# Altium PCB CAN_CANS6.PcbDoc
Units mm, origin at the board's own origin, x right, y up, seen from the top; angles counter-clockwise.
Board outline 61 x 43 mm, 2 copper layers (Top Layer, Bottom Layer); 72 components, 51 nets, 290 pads, 196 vias.
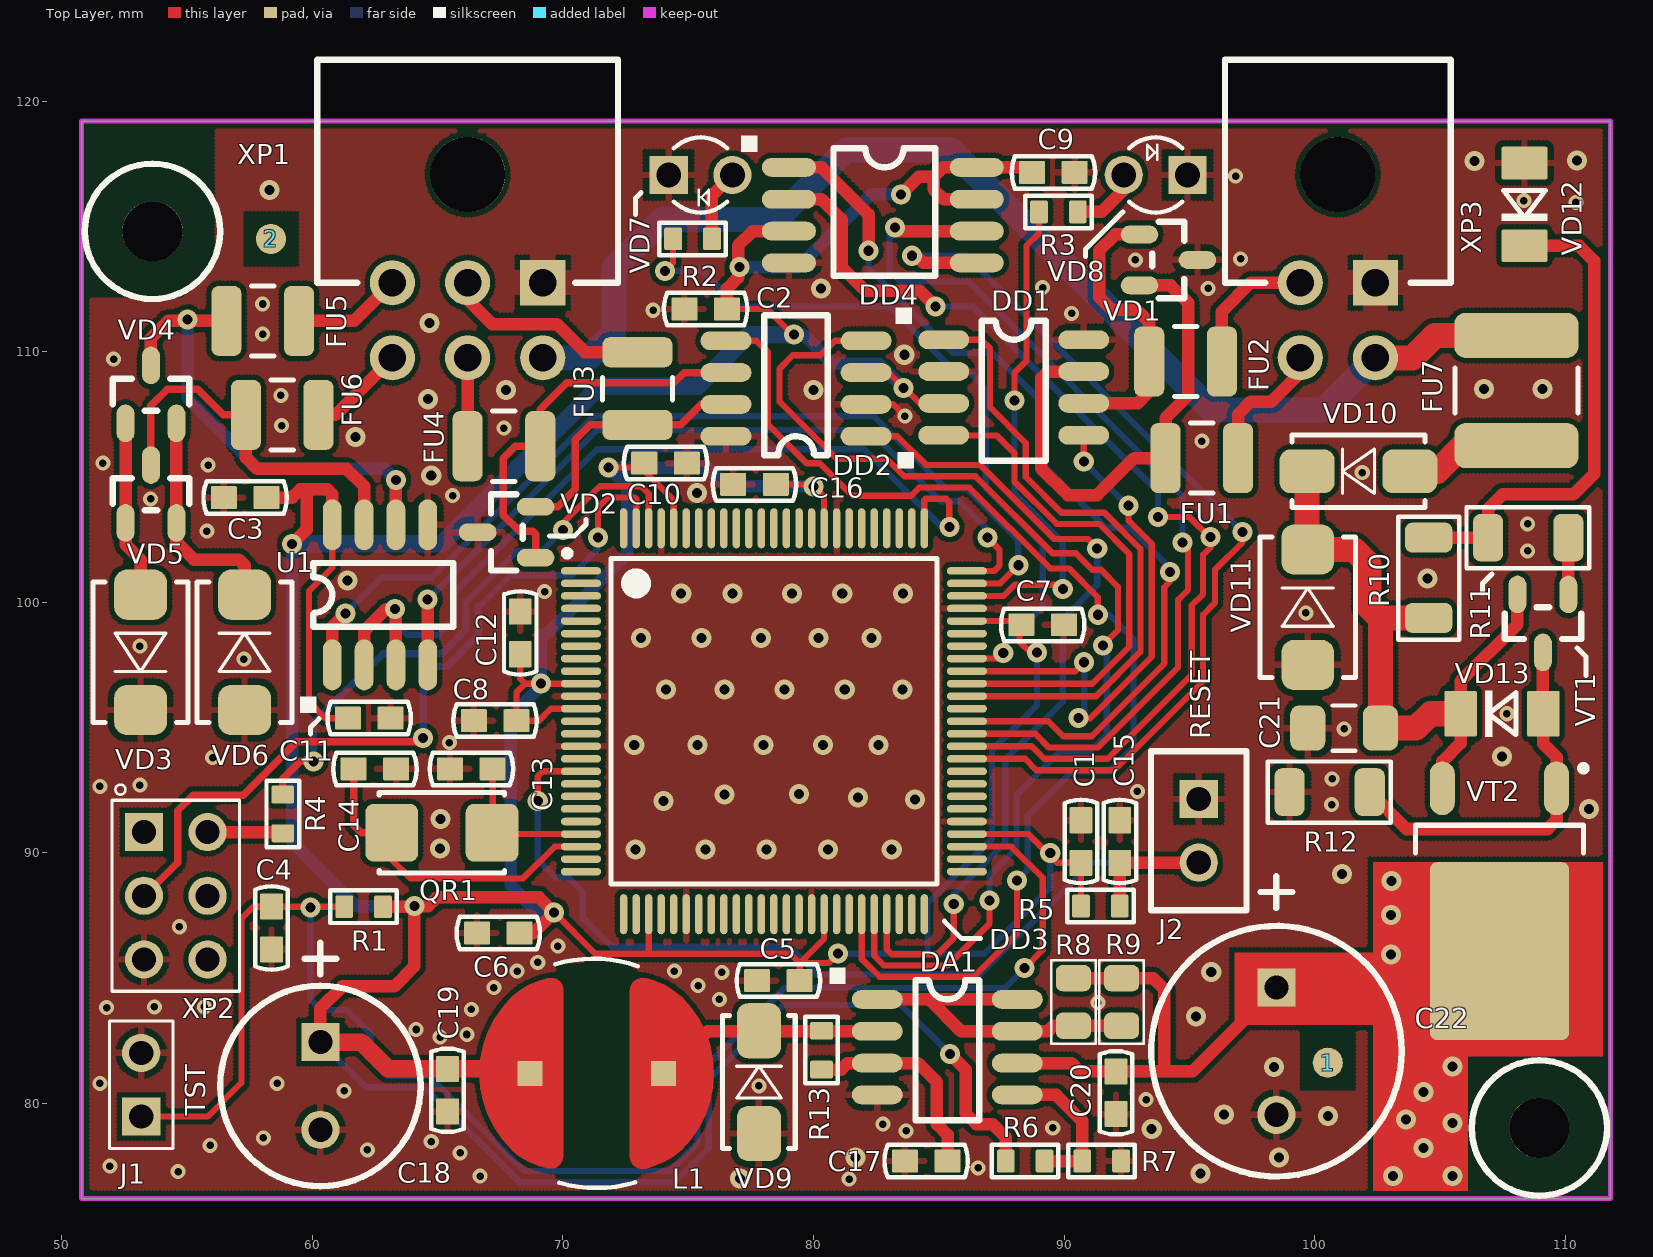
[diagram p0: Top Layer view]
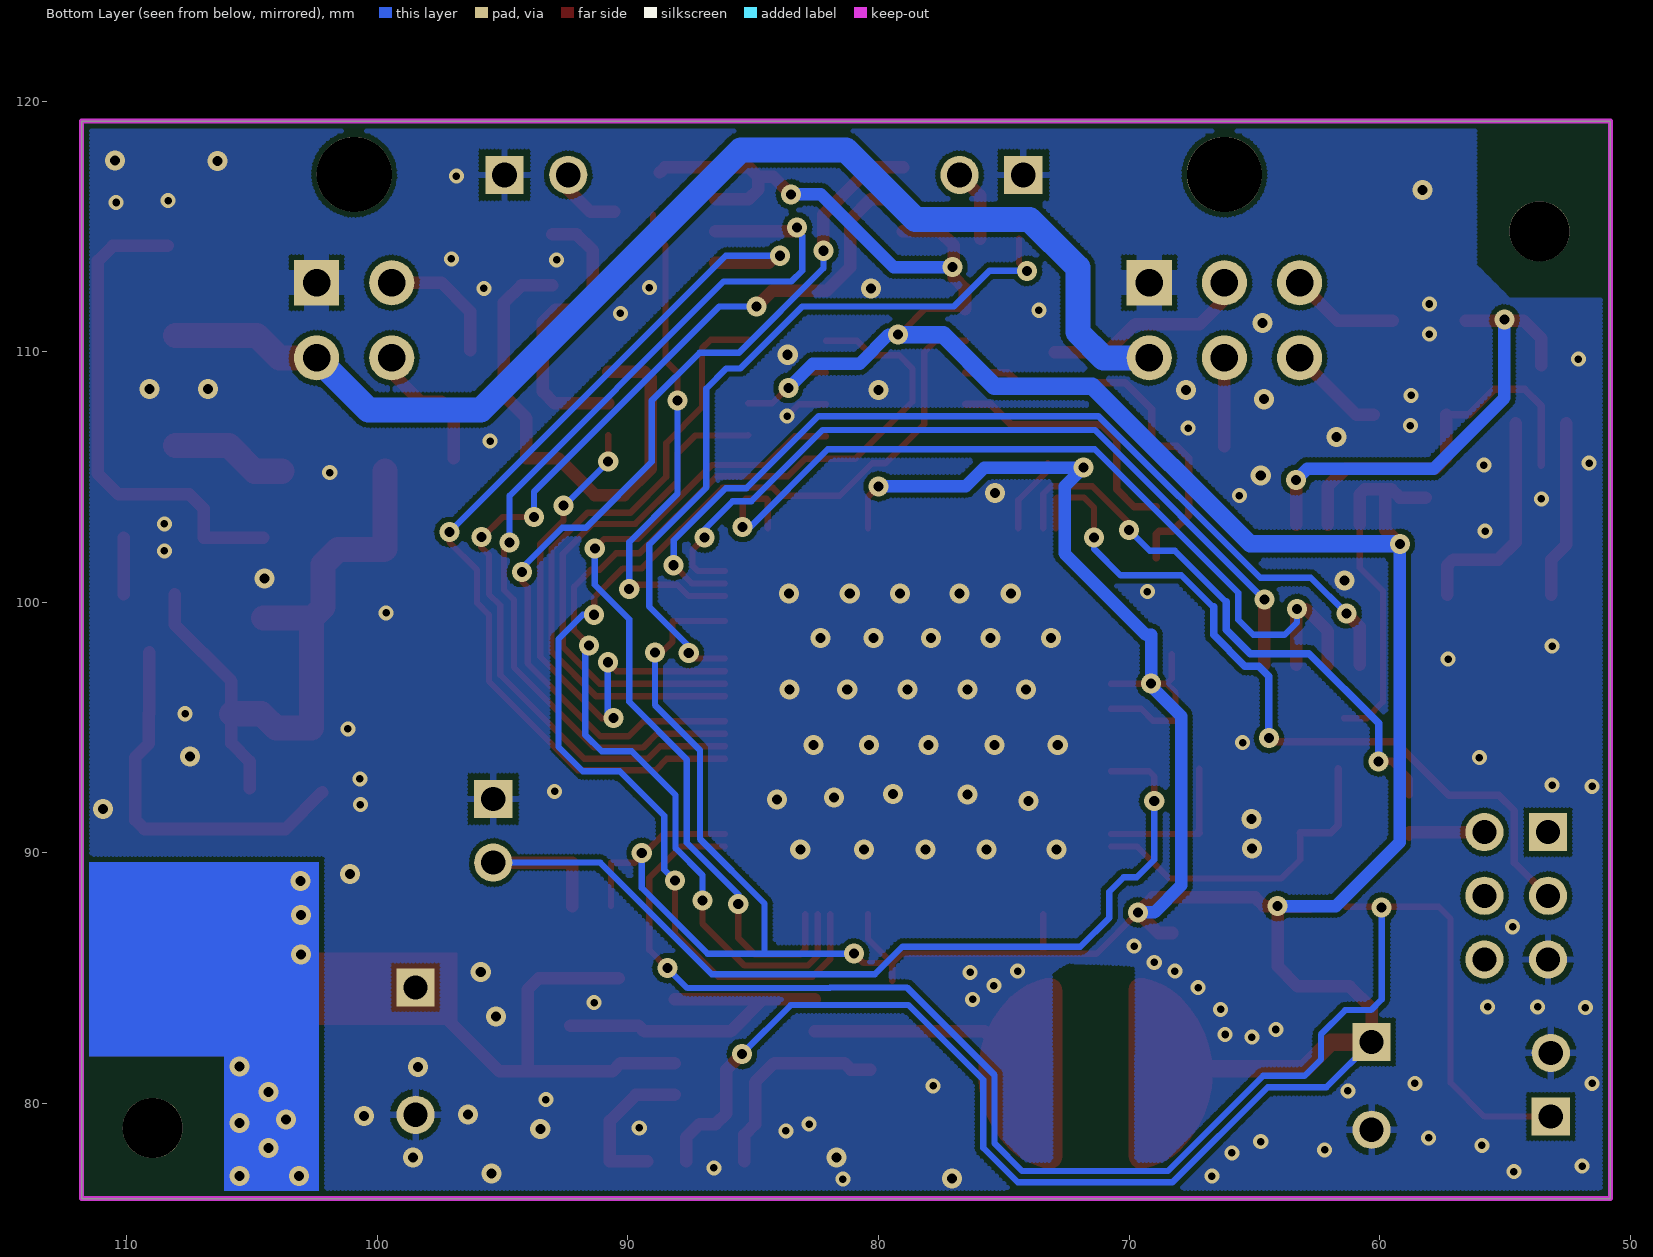
[diagram p1: Bottom Layer view, seen from below]

## Layer stack, top to bottom
Top Solder: solder mask 0.0102, Solder Resist, Dk 3.5
Top Layer: signal copper 0.0356
Dielectric 1: dielectric 0.32, FR-4, Dk 4.8
Bottom Layer: signal copper 0.0356
Bottom Solder: solder mask 0.0102, Solder Resist, Dk 3.5

## Board outline
50.8,76.2 111.8,76.2 111.8,119.2 50.8,119.2

## Design rules (kind name [scope] priority, off if disabled: settings)
Clearance [All] p1: gap=0.2
ComponentClearance [All] p1: gap=0 collisioncheckmode=3 verticalgap=2540 showdistances=TRUE
HoleSize [All] p1: absolutevalues=TRUE maxlimit=5 minlimit=0.025 maxpercent=80.000 minpercent=20.000
PolygonConnect PolygonConnect_2 [(InNet('GND') AND InComponent('XP1')) OR (InNet('GND') AND InComponent('XP3'))] p1: connectstyle=Relief reliefconductorwidth=1 reliefentries=4 polygonreliefangle="90 Angle" airgapwidth=0.2
PolygonConnect PolygonConnect_1 [IsVia] p2: connectstyle=Direct reliefconductorwidth=0.254 reliefentries=4 polygonreliefangle="90 Angle" airgapwidth=0.254
PolygonConnect [All] p3: connectstyle=Relief reliefconductorwidth=0.254 reliefentries=4 polygonreliefangle="90 Angle" airgapwidth=0.254
RoutingVias [All] p1: holewidth=0.4 width=0.8 viastyle="Through Hole" minholewidth=0.3 minwidth=0.6 maxholewidth=0.5 maxwidth=1
SolderMaskExpansion [All] p1: expansion=0.102
Width [All] p1: maxlimit=3 minlimit=0.2 preferedwidth=0.5
28 further rules are at their usual default settings.

## Classes and differential pairs
component class Power: C17 C18 C19 C20 C21 C22 DA1 FU7 L1 R6 R7 R8 R9 R10 R11 R12 R13 R14 VD9 VD10 VD11 VD12 VD13 VT1 VT2 XP3
component class Main: 1 2 C4 C5 C6 C7 C8 C9 C10 C11 C12 C13 C14 C15 C16 DD3 DD4 J1 J2 QR1 R1 R2 R3 R4 R5 VD7 VD8 XP2
component class Interface: C1 C2 C3 DD1 DD2 FU1 FU2 FU3 FU4 FU5 FU6 U1 VD1 VD2 VD3 VD4 VD5 VD6 XP1

## Components (designator, comment, footprint, x,y, rotation, side; value= is the part's Value field where it differs from the comment)
1 "REPER1.2" REPER1.2 100.525,81.625 r90 top
2 "REPER1.2" REPER1.2 58.35,114.5 r90 top
C1 "0.1uF" CC0603-3M 90.675,90.45 r270 top
C2 "0.1uF" CC0603-3M 75.7,111.7 r0 top
C3 "0.1uF" CC0603-3M 57.325,104.175 r180 top
C4 "220pF" CC0603-3M 58.375,87 r270 top
C5 "0.1uF" CC0603-3M 78.6,84.9 r0 top
C6 "0.1uF" CC0603-3M 67.425,86.8 r0 top
C7 "0.1uF" CC0603-3M 89.15,99.1 r180 top
C8 "0.1uF" CC0603-3M 67.3,95.275 r0 top
C9 "0.1uF" CC0603-3M 89.575,117.15 r180 top
C10 "0.1uF" CC0603-3M 74.1,105.55 r180 top
C11 "0.1uF" CC0603-3M 62.275,95.375 r180 top
C12 "0.1uF" CC0603-3M 68.3,98.775 r270 top
C13 "22pF" CC0603-3M 66.35,93.35 r0 top
C14 "22pF" CC0603-3M 62.5,93.35 r180 top
C15 "200pF" CC0603-3M 92.225,90.45 r270 top
C16 "0.1uF" CC0603-3M 77.65,104.7 r0 top
C17 "330pFx50V" CC0603-3M 84.5,77.7 r0 top
C18 "1000uFx10V" CC8X3.5 60.325,82.45 r270 top
C19 "0.1uFx16V" CC0603-3M 65.4,80.525 r90 top
C20 "0.1uFx50V" CC0603-3M 92.075,80.425 r270 top
C21 "0.1uFx250V" CC1206-MIDI 99.725,94.975 r0 top
C22 "470uF" CC16X10_CAP0.5(1)(Primary) 98.475,84.625 r270 top
DA1 "MC33063" SO-8 82.55,84.15 r270 top
DD1 "SN65HVD234D" SO-8 85.2,110.475 r270 top
DD2 "SN65HVD234D" SO-8 82.1,106.625 r90 top
DD3 "LPC1768FBD100" TQFP-100 70.725,101.25 r0 top
DD4 "M25P40" EIAJ_SO8 79.025,117.35 r0 top
FU1 "MICROSMD010F-2" RC1210 95.5,105.75 r0 top
FU2 "MICROSMD010F-2" RC1210 94.85,109.6 r0 top
FU3 "MICROSMD010F-2" RC1210 72.975,108.525 r90 top
FU4 "MICROSMD010F-2" RC1210 67.65,106.225 r180 top
FU5 "MICROSMD010F-2" RC1210 58.025,111.225 r0 top
FU6 "MICROSMD010F-2" RC1210 58.8,107.475 r0 top
FU7 "MF-SMDF050" MF-SMDF 108.05,108.45 r270 top
J1 "PLS-02" PLS-02 53.175,79.475 r90 top
J2 "PLS-02" PIN2W 95.375,92.15 r270 top
L1 "220uH" SDR0805 71.35,81.2 r0 top
QR1 "NX5032GA-12.000MHz LN-CD-1" AC5032_2 65.175,90.8 r180 top
R1 "10k" RC0603-3M 62.05,87.85 r0 top
R2 "330" RC0603-3M 75.175,114.5 r0 top
R3 "330" RC0603-3M 89.775,115.575 r0 top
R4 "100E" RC0603-3M 58.825,91.55 r270 top
R5 "10k" RC0603-3M 91.45,87.875 r180 top
R6 "18k 1%" RC0603-3M 88.45,77.7 r180 top
R7 "11k 1%" RC0603-3M 91.5,77.7 r180 top
R8 "1E" RC0805_IPC_NOM 90.375,84.05 r270 top
R9 "1E" RC0805_IPC_NOM 92.3,84.05 r270 top
R10 "220k" RC1206-2M 104.55,102.575 r270 top
R11 "220k" RC1206-2M 110.125,102.575 r180 top
R12 "220k" RC1206-2M 102.2,92.425 r180 top
R13 "560k" RC0603-3M 80.325,82.125 r270 top
U1 "ST3485EBDR" SO-8 60.8,97.5 r0 top
VD1 "PESD2CAN" SOT-23(123) 93,114.675 r180 top
VD2 "PESD2CAN" SOT-23(123) 68.925,101.775 r0 top
VD3 "SMBJ5.0A" SMB 53.15,98 r90 top
VD4 "BAV99" SOT-23(GSD) 52.55,107.125 r0 top
VD5 "BAV99" SOT-23(GSD) 52.55,103.15 r0 top
VD6 "SMBJ5.0A" SMB 57.3,98 r270 top
VD7 "BL-B45V1-L" LED3 74.225,117.05 r0 top
VD8 "GNL-3014GC" LED3 94.925,117.05 r180 top
VD9 "SS14" SMA 77.825,80.85 r90 top
VD10 "GS1M" SMA 101.75,105.225 r180 top
VD11 "SMBJ150A" SMB 99.725,99.8 r270 top
VD12 "BZV55C36" SOD-80 108.375,115.875 r90 top
VD13 "BZV55C15" SOD-80 107.475,95.55 r0 top
VT1 "BC856B" SOT-23(123) 110.125,100.325 r90 top
VT2 "IRFR9220" D-PAK(TO-252AA) 107.375,88.075 r270 top
XP1 "MIF2X03PRP" MIF2X03PRP 66.2,112.75 r90 top
XP2 "PLD-06" PLD-06 54.55,88.275 r270 top
XP3 "MIF2X02PRP" MIF2X02PRP 102.425,112.75 r90 top

## Footprints (in the part's own frame and the unit in brackets; to place one, negate y for a bottom-side part, rotate by r counter-clockwise, add the part's x,y. Pads: shape width x height; smd on the part's side, far side on the other; paste and mask are expansions set on the pad)
AC5032_2 [mm]
  rrect30% 2.1x2.3 smd: 1(-2,0) 2(2,0)
  silkscreen extent -2.5,-1.6 2.5,1.6
CC8X3.5 [mil]
  rect 60x60 hole 38: 1(0,0)
  round 60 hole 38: 2(137.8,0)
  silkscreen extent -156,-157 226,157, body extent -88,-159 229,158, height 493
CC16X10_CAP0.5(1)(Primary) [mil]
  round 60 hole 38: 1(200,0)
  rect 60x60 hole 38: 2(0,0)
  silkscreen extent -175,-197 297,197
CC0603-3M [mil]
  rrect10% 40.98x35.98 smd paste-1000: 1(-33.5,0) 2(33.5,0)
  silkscreen extent -65,-26 65,26
CC1206-MIDI [mm]
  rrect50% 1.4x1.8 smd: 1(0,0) 2(2.9,0)
  silkscreen extent 1,-0.9 1.9,0.9
D-PAK(TO-252AA) [mm]
  oval 2.15x1 smd: 1(-4.5,2.28) 2(-4.5,-2.28)
  rrect10% 7.1x5.55 smd: 3(2,0)
  silkscreen extent -5.42,-3.35 -1.92,3.47
EIAJ_SO8 [mil]
  oval 85x29.53 smd: 1(0,0) 2(0,-50) 3(0,-100) 4(0,-150) 5(295,-150) 6(295,-100) 7(295,-50) 8(295,0)
  silkscreen extent -75,-170 230,50
LED3 [mil]
  rect 60x60 hole 39: 1(0,0)
  round 60 hole 39: 2(100,0)
  silkscreen extent 8,-59 92,59
MF-SMDF [mm]
  rrect50% 1.8x4.95 smd: 1(-2.2,0) 2(2.2,0)
  silkscreen extent -0.9,-2.45 0.9,2.45
MIF2X02PRP [mm]
  rect 1.8x1.8 hole 1.1: 1(0,0)
  round 1.8 hole 1.1: 2(0,3) 3(-3,0) 4(-3,3)
  round 3 hole 3 unplated: 5(4.32,1.5)
  silkscreen extent 0,-3 8.9,6
MIF2X03PRP [mm]
  rect 1.8x1.8 hole 1.1: 1(0,-3)
  round 1.8 hole 1.1: 2(0,0) 3(0,3) 4(-3,-3) 5(-3,0) 6(-3,3)
  round 3 hole 3 unplated: 7(4.32,0)
  silkscreen extent 0,-6 8.9,6
PIN2W [mil]
  rect 60x60 hole 38: 1(0,0)
  round 60 hole 38: 2(100,0)
  silkscreen extent -75,-75 175,75
PLD-06 [mm]
  rect 1.524x1.524 hole 0.956: 1(-2.55,-1.265)
  round 1.524 hole 0.956: 2(-2.55,1.275) 3(-0.01,-1.265) 4(-0.01,1.275) 5(2.53,-1.265) 6(2.53,1.275)
  silkscreen extent -3.82,-2.53 3.8,2.55, body extent -3.82,-2.53 3.8,2.55, height 10.1
PLS-02 [mil]
  rect 60x60 hole 37.99: 1(0,0)
  round 60 hole 37.99: 2(100,0)
  silkscreen extent -50,-50 150,50, body extent -50,-50 150,50, height 398
RC0603-3M [mm]
  rrect20% 0.71x0.91 smd paste-25.4: 1(-0.775,0) 2(0.775,0)
  silkscreen extent -1.32,-0.65 1.33,0.65
RC0805_IPC_NOM [mm]
  rrect50% 1.05x1.4 smd: 1(-0.95,0) 2(0.95,0)
  silkscreen extent -1.67,-0.89 1.67,0.89
RC1206-2M [mm]
  rrect50% 1.2x1.9 smd: 1(0,0) 2(3.2,0)
  silkscreen extent -0.84,-1.22 4.06,1.22
RC1210 [mm]
  rrect50% 1.2x2.8 smd: 1(-1.45,0) 2(1.45,0)
  silkscreen extent -0.45,-1.4 0.45,1.4
REPER1.2 [mm]
  round 1.2 smd paste-25.4 mask-25.4: 1(0,0)
  Top Layer pour cut-out: -1.2,-1.2 1.2,-1.2 1.2,1.2 -1.2,1.2
SDR0805 [mm]
  rect 1x1 smd paste-25.4 mask-25.4: 1(-2.667,0) 2(2.667,0)
  Top Layer region: -1.327,3.319 -1.362,3.503 -1.461,3.66 -1.612,3.771 -1.792,3.818 -1.977,3.797 -2.318,3.69 -2.706,3.535 -3.065,3.321 -3.387,3.053 -3.392,3.047 -3.771,2.627 -4.09,2.16 -4.345,1.654 -4.53,1.119 -4.642,0.565 -4.68,0 -4.642,-0.565 -4.53,-1.119 -4.345,-1.654 -4.09,-2.16 -3.771,-2.627 -3.392,-3.047 -3.381,-3.059 -3.063,-3.323 -2.709,-3.534 -2.325,-3.688 -1.996,-3.791 -1.806,-3.813 -1.62,-3.764 -1.465,-3.65 -1.363,-3.488 -1.327,-3.299
  Top Layer region: 1.327,-3.319 1.362,-3.503 1.461,-3.66 1.612,-3.771 1.792,-3.818 1.977,-3.797 2.318,-3.69 2.706,-3.535 3.065,-3.321 3.387,-3.053 3.392,-3.047 3.771,-2.627 4.09,-2.16 4.345,-1.654 4.53,-1.119 4.642,-0.565 4.68,0 4.642,0.565 4.53,1.119 4.345,1.654 4.09,2.16 3.771,2.627 3.392,3.047 3.381,3.059 3.063,3.323 2.709,3.534 2.325,3.688 1.996,3.791 1.806,3.813 1.62,3.764 1.465,3.65 1.363,3.488 1.327,3.299
  silkscreen extent -1.66,-4.57 1.64,4.57
SMA [mm]
  rrect50% 2.2x1.75 smd: 1(-2.05,0) 2(2.05,0)
  silkscreen extent -2.65,-1.45 2.65,1.45
SMB [mm]
  rrect50% 2x2.1 smd: 1(2.3,0) 2(-2.3,0)
  silkscreen extent -2.8,-1.9 2.8,1.9
SO-8 [mil]
  oval 29.53x80 smd: 1(0,0) 2(50,0) 3(100,0) 4(150,0) 5(150,220) 6(100,220) 7(50,220) 8(0,220)
  silkscreen extent -50,-75 190,160
SOD-80 [mm]
  rrect10% 1.3x1.83 smd paste-25.4: 1(1.651,0) 2(-1.651,0)
  silkscreen extent -0.66,-0.91 0.56,0.91
SOT-23(123) [mil]
  oval 59.06x28.07 smd: 1(-0.5,0) 2(-0.5,80) 3(-91.5,40)
  silkscreen extent -71,-20 -21,100
SOT-23(GSD) [mil]
  oval 28.07x59.06 smd: 1(0,0.5) 2(80,0.5) 3(40,91.5)
  silkscreen extent -20,20 100,70
TQFP-100 [mm]
  oval 1.6x0.3 smd: 1(0,0) 2(0,-0.5) 3(0,-1) 4(0,-1.5) 5(0,-2) 6(0,-2.5) 7(0,-3) 8(0,-3.5) 9(0,-4) 10(0,-4.5) 11(0,-5) 12(0,-5.5) 13(0,-6) 14(0,-6.5) 15(0,-7) 16(0,-7.5) 17(0,-8) 18(0,-8.5) 19(0,-9) 20(0,-9.5) 21(0,-10) 22(0,-10.5) 23(0,-11) 24(0,-11.5) 25(0,-12) 51(15.4,-12) 52(15.4,-11.5) 53(15.4,-11) 54(15.4,-10.5) 55(15.4,-10) 56(15.4,-9.5) 57(15.4,-9) 58(15.4,-8.5) 59(15.4,-8) 60(15.4,-7.5) 61(15.4,-7) 62(15.4,-6.5) 63(15.4,-6) 64(15.4,-5.5) 65(15.4,-5) 66(15.4,-4.5) 67(15.4,-4) 68(15.4,-3.5) 69(15.4,-3) 70(15.4,-2.5) 71(15.4,-2) 72(15.4,-1.5) 73(15.4,-1) 74(15.4,-0.5) 75(15.4,0)
  oval 0.3x1.6 smd: 26(1.7,-13.7) 27(2.2,-13.7) 28(2.7,-13.7) 29(3.2,-13.7) 30(3.7,-13.7) 31(4.2,-13.7) 32(4.7,-13.7) 33(5.2,-13.7) 34(5.7,-13.7) 35(6.2,-13.7) 36(6.7,-13.7) 37(7.2,-13.7) 38(7.7,-13.7) 39(8.2,-13.7) 40(8.7,-13.7) 41(9.2,-13.7) 42(9.7,-13.7) 43(10.2,-13.7) 44(10.7,-13.7) 45(11.2,-13.7) 46(11.7,-13.7) 47(12.2,-13.7) 48(12.7,-13.7) 49(13.2,-13.7) 50(13.7,-13.7) 76(13.7,1.7) 77(13.2,1.7) 78(12.7,1.7) 79(12.2,1.7) 80(11.7,1.7) 81(11.2,1.7) 82(10.7,1.7) 83(10.2,1.7) 84(9.7,1.7) 85(9.2,1.7) 86(8.7,1.7) 87(8.2,1.7) 88(7.7,1.7) 89(7.2,1.7) 90(6.7,1.7) 91(6.2,1.7) 92(5.7,1.7) 93(5.2,1.7) 94(4.7,1.7) 95(4.2,1.7) 96(3.7,1.7) 97(3.2,1.7) 98(2.7,1.7) 99(2.2,1.7) 100(1.7,1.7)
  silkscreen extent -0.67,-12.5 14.2,0.82

## Part data
C1 C2 C3 C4 C5 C6 C7 C8 C9 C10 C11 C12 C13 C14 C15 C16 C17 C19 C20: library part CC0603, "CC0603"
C18: library part CAP0.35, "CAP0.35"
C21: library part CC1206, "CC1206"
C22: library part CAP0.5(1), "CAP0.5(1)"
DA1: library part MC34063, "MC34063"
DD1 DD2: "CAN Transceiver"
DD3: "Cortex -M3 32-Bit Microcontroller, 512KB Flash, 64KB RAM, 100-Lead LQFP"
DD4: library part S25FL016A0LMFI01, "S25FL016A0LMFI01"
FU1 FU2 FU3 FU4 FU5 FU6: library part MICROSMD, "MICROSMD"
FU7: library part MF-SMDF, "MF-SMDF"
L1: library part SDR0805, "SDR0805"
QR1: library part AC5032_2, "AC5032/2"
R1 R2 R3 R4 R5 R6 R7 R13: library part RC0603, "RC0603"
R8 R9: library part RC0805, "RC0805"
R10 R11 R12: library part RC1206, "RC1206"
VD1 VD2: "TVS for CAN"
VD3 VD6 VD11: library part SMBJ, "SMBJ"
VD4 VD5: "1.0 Ampere General Purpose Rectifier"
VD7 VD8: library part LED_3, "LED_3"
VD9: "Schottky Rectifier"
VD12 VD13: library part BZV55C12, "Zener Voltage Regulator Diode"
VT2: "HEXFET Power MOSFET"
XP1: "MIF2x03PRP"
XP2: "PLD06"

## Free pads (board coordinates)
  round 2.4 hole 2.4 unplated: 0(53.625,114.8) 0(108.968,79.017)

## Via types
v1: diameter 0.8, hole 0.4, Top Layer to Bottom Layer, 123 vias
v2: diameter 0.6, hole 0.3, Top Layer to Bottom Layer, 73 vias

## Nets (pads, with @x,y where several pads share a name; then routed paths per layer and width w, separated by ;. In a path a pad name is that pad's centre, name@x,y a point inside that pad or via, vN(x,y) a via of type N, cw(c..) or ccw(c..) an arc to the next point about the centre after c; other vN are vias at no path point)
+3V3: C1.2 C2.2 C3.1 C5.2 C6.2 C7.2 C8.2 C9.2 C10.2 C11.2 C12.2 C16.2 C18.1 C19.2 DD1.3 DD2.3 DD3.10 DD3.12 DD3.28 DD3.42 DD3.54 DD3.71 DD3.84 DD3.96 DD4.3 DD4.7 DD4.8 L1.1 R1.2 R5.2 R6.2 U1.8 | length 250.1
  Top Layer w0.25: U1.8 60.8,101.375 59.875,100.45 59.875,96.025 60.525,95.375 C11.2 ; C12.2 68.3,96.95 68.5,96.75 ; v1(69.649,87.626) 71.3,85.975 79.077,85.975 79.451,85.601 ; DD3.12 69.525,95.75 69.05,95.275 C8.2 68.151,96.401 68.5,96.75 ; DD3.10 v1(69.125,96.75) 68.5,96.75 ; v1(71.825,105.375) 73.074,105.375 C10.2 73.249,105.251 74.425,104.075 DD3.96 ; 73.425,86.05 DD3.28 ; C2.2 78.15,111.7 v1@79,110.85 ; C16.2 79.925,104.7 v1(80,104.625) 80.425,104.2 DD3.84 ; C5.2 79.451,85.601 ; DD3.42 80.425,86.575 79.451,85.601 ; v1(80.975,85.975) 80.601,85.601 79.451,85.601 ; DD2.3 83.01,109.165 84.24,107.935 DD1.3 ; DD3.54 88.575,90.75 89.726,89.599 C1.2 R5.2 ; DD3.71 88.224,99.25 88.224,98.426 v1@88.65,98
  Top Layer w0.5: C3.1 59.2,104.175 59.525,104.5 59.775,104.5 ; v1(59.2,102.325) 59.775,102.9 59.775,104.5 ; C18.1 60.325,83.8 61.2,84.675 63.275,84.675 64.075,85.475 v1(64.075,87.875) ; U1.8 60.8,104.3 60.6,104.5 59.775,104.5 ; R1.2 64.05,87.85 v1(64.075,87.875) ; C6.2 68.823,86.8 v1(69.649,87.626) 69.05,88.225 64.975,88.225 64.625,87.875 v1(64.075,87.875) ; C2.2 76.551,112.501 77,112.95 77,114.225 77.585,114.81 DD4.3 ; v1(83.5,116.275) 84.2,116.975 84.8,116.975 ; v1(85.45,81.975) 86.075,81.35 86.075,79.6 86.5,79.175 87.15,79.175 87.675,78.65 R6.2 ; DD4.7 85.195,116.08 84.8,116.475 84.8,116.975 ; DD4.8@86.525,117.357 DD4.8 ; C9.2 88.524,117.35 DD4.8 ; 84.8,116.975 85.175,117.35 DD4.8
  Top Layer w0.7: C18.1 61.95,82.45 63.024,81.376 C19.2 67.451,81.376 67.575,81.5
  Bottom Layer w0.25: C18.1 62.128,80.647 64.475,80.647 68.272,76.85 74.45,76.85 75.825,78.225 75.825,80.947 78.803,83.925 83.5,83.925 v1(85.45,81.975) ; v1(80.975,85.975) 86.825,85.975 89.45,88.6 v1(89.45,90) ; 84.55,86.025 84.55,87.975 87.125,90.55 87.125,94.1 88.925,95.9 v1(88.925,98)
  Bottom Layer w0.5: v1(59.2,102.325) 59.2,90.425 61.75,87.875 v1(64.075,87.875) ; v1(69.649,87.626) 68.999,87.626 67.925,88.7 67.925,95.45 69.125,96.65 69.125,98.7 69.325,98.7 72.575,101.95 72.575,104.625 v1(71.825,105.375) 75.775,105.375 76.525,104.625 v1(80,104.625) ; v1(77.05,113.375) 79.4,113.375 82.3,116.275 v1(83.5,116.275) ; v1(79.225,110.675) 79.6,110.675 80.75,109.525 82.625,109.525 v1(83.6,108.55)
  Bottom Layer w0.7: v1(59.2,102.325) 65.17,102.325 71.47,108.625 75.375,108.625 77.425,110.675 v1(79.225,110.675)
CAN_CON: DD3.68 R2.1 | length 29.8
  Top Layer w0.25: v1(74.075,113.225) 74.4,113.55 R2.1 ; DD3.68 87.35,97.75 v1(87.575,97.975)
  Bottom Layer w0.25: v1(74.075,113.225) 75.575,113.225 77,111.8 83.05,111.8 85.525,109.325 86.075,109.325 86.875,108.525 86.875,104.575 89.15,102.3 89.15,99.825 87.575,98.25 v1(87.575,97.975)
CAN_D: DD2.1 DD3.47 | length 33.4
  Top Layer w0.25: DD2.1 83.35,106.625 84.5,105.475 86.65,105.475 89.6,102.525 90.95,102.525 v1(91.325,102.15) ; DD3.47 82.925,86.15 83.125,85.95 84.95,85.95 85.6,86.6 v1(85.6,87.95)
  Bottom Layer w0.25: v1(85.6,87.95) 85.6,88.35 87.65,90.4 87.65,93.725 89.95,96.025 89.95,99.325 91.325,100.7 v1(91.325,102.15)
CAN_D_S6: DD1.1 DD3.65 | length 25.2
  Top Layer w0.25: DD1.1 86.7,110.475 87.05,110.125 87.05,107.775 88.475,106.35 88.475,105 89.9,103.575 91.614,103.575 93.05,102.139 93.05,98.025 91.275,96.25 DD3.65
CAN_EN: DD2.5 DD3.45 | length 47.1
  Top Layer w0.25: DD2.5 77.725,110.435 78.175,109.985 78.175,107.1 79.725,105.55 80.25,105.55 81.55,104.25 83.9,104.25 84.225,104.575 86.225,104.575 89.45,101.35 90.2,101.35 91.35,100.2 v1(91.35,99.5) ; DD3.45 81.925,85.764 82.639,85.05 86.4,85.05 88.125,86.775 v1(88.125,88.9)
  Bottom Layer w0.25: v1(88.125,88.9) 88.55,89.325 88.55,91.475 90.325,93.25 91.8,93.25 92.775,94.225 92.775,98.525 91.8,99.5 v1(91.35,99.5)
CAN_EN_S6: DD1.5 DD3.67 | length 21.1
  Top Layer w0.25: DD3.67 90.45,97.25 v1(90.804,97.605) ; v1(90.575,95.375) 91.05,95.375 93.5,97.825 93.5,102.325 92.575,103.25 v1(92.575,103.85) ; v1(90.788,105.612) DD1.5
  Bottom Layer w0.25: v1(90.575,95.375) 90.804,95.604 v1(90.804,97.605) ; v1(90.788,105.612) 92.55,103.85 v1(92.575,103.85)
CAN_H: FU3.2 XP1.2 | length 8.3
  Top Layer w0.5: XP1.2 66.2,112.075 67.175,111.1 69.759,111.1 70.884,109.975 FU3.2
CAN_L: FU4.2 XP1.5 | length 3.5
  Top Layer w0.5: FU4.2 XP1.5
CAN_R: DD2.4 DD3.46 | length 45.3
  Top Layer w0.25: DD2.4 80.86,110.435 80.275,109.85 79.175,109.85 78.65,109.325 78.65,108 80.925,105.725 82.925,105.725 83.625,105.025 86.464,105.025 89.539,101.95 90.475,101.95 91.125,101.3 91.475,101.3 92.15,100.625 92.15,98.875 v1(91.55,98.275) ; DD3.46 82.425,85.9 82.825,85.5 85.35,85.5 87.025,87.175 v1(87.025,88.1)
  Bottom Layer w0.25: v1(87.025,88.1) 87.025,89.1 88.1,90.175 88.1,92.3 89.85,94.05 91.05,94.05 91.7,94.7 91.7,98.125 v1(91.55,98.275)
CAN_R_S6: DD1.4 DD3.66 | length 20.8
  Top Layer w0.25: DD1.4 85.215,106.65 87.325,106.65 88.025,105.95 88.025,104.814 89.714,103.125 91.4,103.125 92.6,101.925 92.6,98.225 91.125,96.75 DD3.66
CANH_S6: FU1.2 XP3.4 | length 5.5
  Top Layer w0.5: FU1.2 96.95,107.5 97.45,108 98.275,108 99.425,109.15 XP3.4
CANL_S6: FU2.2 XP3.2 | length 5.2
  Top Layer w0.5: FU2.2@96.3,110.05 96.3,111.6 97.45,112.75 XP3.2
GND: C1.1 C2.1 C3.2 C4.2 C5.1 C6.1 C7.1 C8.1 C9.1 C10.1 C11.1 C12.1 C13.1 C14.1 C15.1 C16.1 C17.1 C18.2 C19.1 C20.2 C21.1 C22.1 DA1.4 DD1.2 DD1.8 DD2.2 DD2.8 DD3.11 DD3.15 DD3.31 DD3.41 DD3.55 DD3.72 DD3.83 DD3.97 DD4.4 J1.2 J2.1 R7.1 R12.2 U1.5 VD1.3 VD2.3 VD3.2 VD6.1 VD7.1 VD8.1 VD9.1 VD11.1 VD12.1 XP1.1 XP2.5 XP3.1 | length 1.7
  Top Layer w0.25: DD2.2 83.18,107.895 v2(83.65,107.425)
  other v1: 77.075,77 95.45,77.2 81.675,77.85 98.575,77.85 93.5,78.975 100.525,79.5 96.375,79.55 98.375,81.45 95.275,83.475 95.875,85.25 101.1,89.15 72.9,90.125 75.7,90.125 78.125,90.125 80.575,90.125 83.125,90.125 65.1,90.175 65.125,91.35 110.95,91.75 74.025,92.075 84.05,92.125 81.775,92.2 76.45,92.325 79.425,92.35 107.475,93.85 72.85,94.3 75.375,94.3 78,94.3 80.375,94.3 82.6,94.3 74.125,96.525 76.45,96.525 78.85,96.525 81.25,96.525 83.562,96.525 73.125,98.575 75.525,98.575 77.9,98.575 80.2,98.575 82.325,98.575 74.725,100.35 76.775,100.35 79.15,100.35 81.15,100.35 83.575,100.35 61.4,100.875 104.5,100.95 75.35,104.35 64.75,105.05 61.725,106.6 64.625,108.1 67.725,108.475 80,108.475 106.75,108.5 109.1,108.5 83.625,109.875 64.675,111.15 80.3,112.525 58.3,116.45 106.375,117.6 110.475,117.625
  other v2: 81.425,76.975 66.7,77.1 54.65,77.275 86.575,77.425 51.925,77.5 65.9,78.025 62.2,78.15 55.925,78.325 64.75,78.475 58.05,78.625 83.7,78.9 89.55,79.025 82.775,79.175 93.275,80.15 61.275,80.5 77.825,80.7 51.525,80.8 58.6,80.8 65.1,82.65 66.175,82.75 64.15,82.95 66.35,83.75 51.8,83.825 53.7,83.85 55.7,83.85 91.35,84.025 76.25,84.15 67.25,84.625 75.4,84.7 76.35,85.225 68.175,85.275 74.45,85.275 69,85.625 69.8,86.275 54.7,87.05 100.675,91.925 92.925,92.45 51.525,92.65 53.122,92.7 100.7,92.95 56.025,93.8 65.475,94.4 101.175,94.95 107.675,95.55 57.275,97.725 53.125,98.25 99.65,99.575 69.275,100.425 108.5,102.05 55.8,102.834 108.5,103.125 53.55,104.125 65.6,104.25 101.9,105.175 55.85,105.475 51.65,105.55 95.5,106.425 67.65,106.95 58.775,107.05 58.75,108.25 52.075,109.7 58.025,110.7 90.3,111.525 73.6,111.65 58.025,111.9 95.75,112.525 89.15,112.55 92.85,113.659 97.05,113.7 110.425,115.95 108.35,116.025 96.85,117
MISO: DD3.61 DD4.2 | length 40.6
  Top Layer w0.25: DD3.61 88.714,94.25 89.214,93.75 91.75,93.75 95.1,97.1 95.1,99.875 95.55,100.325 95.55,101.9 95.85,102.2 v1@95.85,102.55 ; v1(93.75,103.4) 95,103.4 v1@95.85,102.55 ; v1(95.85,102.6) v1@95.85,102.55
  Top Layer w0.5: DD4.2 80.32,116.08 81.125,115.275 81.125,113.375 82.075,112.425 84.25,112.425 v1(84.875,111.8)
  Bottom Layer w0.25: v1(84.875,111.8) 86.353,111.8 93.75,104.403 v1@93.75,103.35
MOSI: DD3.60 DD4.5 | length 38.2
  Top Layer w0.25: DD3.60 88.45,93.75 88.9,93.3 92,93.3 95.55,96.85 95.55,99.5 96.025,99.975 96.025,101.3 97.125,102.4 v1(97.125,102.8)
  Top Layer w0.5: v1(83.925,113.825) 84.1,113.825 84.385,113.54 DD4.5
  Bottom Layer w0.25: v1(83.925,113.825) 86.1,113.825 v1(97.125,102.8)
NetC13_2: C13.2 DD3.22 QR1.1 | length 6.2
  Top Layer w0.25: C13.2 QR1.1@67.201,90.826 ; QR1.1@67.25,90.875 QR1.1@67.201,90.826 ; DD3.22 67.225,90.75 QR1.1 QR1.1@67.201,90.826
NetC14_2: C14.2 DD3.23 QR1.2 | length 13.4
  Top Layer w0.25: QR1.2 63.175,89.725 63.925,88.975 68.4,88.975 69.675,90.25 DD3.23
  Top Layer w0.3: C14.2 61.649,91.101 61.95,90.8 QR1.2
NetC15_2: C15.2 DD3.17 J2.2 R5.1 | length 40.7
  Top Layer w0.25: v1(69,92.075) 69,93.05 69.2,93.25 DD3.17
  Top Layer w0.5: R5.1 C15.2 95.364,89.599 J2.2
  Bottom Layer w0.25: v1(69,92.075) 69,89.725 69.7,89.025 70.225,89.025 70.8,88.45 70.8,87.4 71.95,86.25 79.05,86.25 80.146,85.154 86.654,85.154 91.11,89.61 J2.2
NetC17_2: C17.2 DA1.3 R13.2 | length 8.3
  Top Layer w0.5: R13.2 81.1,81.35 81.36,81.61 DA1.3 84.165,81.61 84.925,80.85 84.925,79.175 85.351,78.749 C17.2
NetC21_2: C21.2 R10.2 VD10.2 VD11.2 VD13.2 VT1.2 VT2.2 | length 26.9
  Top Layer w0.5: VT2.2 105.095,93.645 105.824,94.374 VD13.2 105.824,96.849 108.093,99.118 VT1.2
  Top Layer w1: VD10.2 99.7,102.125 VD11.2 101.575,102.1 102.175,101.5 102.175,99.8 102.6,99.375 ; R10.2 102.6,99.375 ; VD13.2 104.625,95.55 104.05,94.975 C21.2 102.625,99.35 102.6,99.375
NetDA1_1: DA1.1 DA1.7 DA1.8 R8.2 R9.2 | length 13.9
  Top Layer w0.5: DA1.1 84.625,84.15 ; DA1.8 84.625,84.15 ; R9.2 R8.2 89.575,83.1 89.355,82.88 DA1.7 85.895,82.88 84.625,84.15
NetDA1_2: DA1.2 L1.2 R13.1 VD9.2 | length 7.1
  Top Layer w0.5: 75.575,82.675 75.775,82.875 79.225,82.875 79.23,82.88 DA1.2
NetDA1_5: DA1.5 R6.1 R7.2 | length 6.1
  Top Layer w0.5: DA1.5 89.685,80.34 90.725,79.3 R7.2 R6.1
NetDD1_6: DD1.6 FU2.1 VD1.1 | length 11.7
  Top Layer w0.5: DD1.6 92.935,107.935 93.4,108.4 FU2.1 93.4,111.175 92.9,111.675 91.9,111.675 91.4,112.175 91.4,114.025 92.05,114.675 VD1.1
NetDD1_7: DD1.7 FU1.1 VD1.2 | length 20.2
  Top Layer w0.5: DD1.7 89.355,109.205 89.1,108.95 89.1,105.325 90.15,104.275 91.325,104.275 92.8,105.75 FU1.1 94.05,107.35 94.95,108.25 94.95,111.95 94.257,112.643 VD1.2
NetDD2_6: DD2.6 FU4.1 VD2.1 | length 16
  Top Layer w0.3: VD2.1 68.912,102.713 68.8,102.825 68.275,102.825 67.625,103.475 67.625,105.75 68.1,106.225 FU4.1 69.1,107.7 70.15,108.75 74.425,108.75 74.84,109.165 DD2.6
NetDD2_7: DD2.7 FU3.1 VD2.2 | length 10.4
  Top Layer w0.3: VD2.2 69.807,103.807 70.5,104.5 70.5,106.475 71.1,107.075 FU3.1 74.7,107.075 75.52,107.895 DD2.7
NetFU5_1: FU5.1 U1.6 VD4.3 | length 19
  Top Layer w0.5: VD4.3 53.566,110.541 54.25,111.225 FU5.1 ; U1.6 63.34,104.865 v1(63.35,104.875)
  Bottom Layer w0.5: v1(55.025,111.275) 55.025,108.15 57.85,105.325 62.9,105.325 v1(63.35,104.875)
NetFU6_1: FU6.1 U1.7 VD5.3 | length 15.3
  Top Layer w0.3: VD5.3 53.566,107.841 54.225,108.5 55.425,108.5 56.45,107.475 FU6.1
  Top Layer w0.5: FU6.1 57.35,105.775 57.8,105.325 61.375,105.325 62.07,104.63 U1.7
NetFU7_2: FU7.2 VD10.1 | length 4.7
  Top Layer w1: VD10.1 104.9,105.225 105.925,106.25 FU7.2
NetR2_2: R2.2 VD7.2 | length 2.9
  Top Layer w0.5: R2.2 75.95,116.235 VD7.2 VD7.2@76.775,117.04
NetR3_2: R3.2 VD8.2 | length 2.8
  Top Layer w0.5: R3.2 91.5,115.575 92.385,116.46 VD8.2
NetR4_2: R4.2 XP2.2 | length 3
  Top Layer w0.5: XP2.2@55.84,90.825 R4.2@58.8,90.825
NetR10_1: R10.1 R11.2 VD12.2 | length 19.9
  Top Layer w0.5: R10.1 R11.2 106.925,103.725 107.5,104.3 110.325,104.3 111.15,105.125 111.15,113.625 110.551,114.224 VD12.2
NetR11_1: R11.1 VT1.1 | length 2.3
  Top Layer w0.5: VT1.1 R11.1
NetR12_1: R12.1 VD13.1 VT1.3 VT2.1 | length 15.1
  Top Layer w0.5: R12.1 103.675,90.95 109.3,90.95 109.655,91.305 VT2.1 109.655,93.82 109.126,94.349 VD13.1 ; VD13.1@109.109,95.567 VT1.3
NetVD3_1: VD3.1 VD4.1 VD5.1 | length 7.1
  Top Layer w0.5: VD4.1 VD5.1 52.55,102.3 53.15,101.7 VD3.1
NetVD4_2: VD4.2 VD5.2 VD6.2 | length 9
  Top Layer w0.5: VD4.2 VD5.2 54.582,102.393 55.275,101.7 57.075,101.7 57.3,101.475 VD6.2
RS485_A: FU5.2 XP1.3 | length 4.4
  Top Layer w0.5: FU5.2 61.675,111.225 XP1.3
RS485_B: FU6.2 XP1.6 | length 3.9
  Top Layer w0.5: FU6.2 60.925,107.475 XP1.6
RS485_CON: DD3.73 R3.1 | length 20.2
  Top Layer w0.25: DD3.73 87.586,100.25 88.036,100.7 89.775,100.7 v1(89.95,100.525) ; v1(88.025,108.05) 88.025,109.15 88.5,109.625 88.5,114.225 89,114.725 R3.1@89,115.475
  Bottom Layer w0.25: v1(88.025,108.05) 88.025,104.325 89.95,102.4 v1(89.95,100.525)
RS485_EN: DD3.76 U1.2 U1.3 | length 36.2
  Top Layer w0.25: DD3.76 84.425,104.075 84.475,104.125 85.3,104.125 85.425,104 v1(85.425,103)
  Top Layer w0.5: U1.2 62.07,98.845 62.95,99.725 v1(63.3,99.725) 63.34,99.685 U1.3
  Bottom Layer w0.25: v1(63.3,99.725) 63.3,99.2 63.8,98.7 65.05,98.7 65.65,99.3 65.65,100.375 71.375,106.1 82.025,106.1 85.125,103 v1(85.425,103)
RXD: DD3.99 XP2.3 | length 31.7
  Top Layer w0.25: v1(71.4,102.575) 71.4,103.775 71.8,104.175 72.875,104.175 72.925,104.125 DD3.99
  Top Layer w0.3: XP2.3@53.3,88.285 54.625,89.61 54.625,91.675 55.25,92.3 57.251,92.3 59.376,94.425 64.275,94.425 v1(64.425,94.575)
  Bottom Layer w0.25: 66.625,99.818 66.668,99.818 67.925,101.075 70.35,101.075 71.4,102.125 v1(71.4,102.575)
  Bottom Layer w0.3: v1(64.425,94.575) 64.425,97.05 64.825,97.45 65.382,97.45 66.625,98.693 66.625,99.818
RXD_485: DD3.74 U1.1 | length 37.8
  Top Layer w0.25: DD3.74 87.45,100.75 v1(88.175,101.475)
  Top Layer w0.5: U1.1 60.8,99.025 v1(61.325,99.55)
  Bottom Layer w0.25: v1(61.325,99.55) 62.75,100.975 64.775,100.975 71.225,107.425 82.4,107.425 85.275,104.55 86.1,104.55 88.175,102.475 v1(88.175,101.475)
SCK: DD3.62 DD4.6 | length 37.6
  Top Layer w0.25: DD3.62 88.85,94.75 89.4,94.2 91.35,94.2 94.55,97.4 94.55,100.1 94.95,100.5 94.95,102.15 v1(94.725,102.375) v1@94.75,102.375
  Top Layer w0.5: v1(83.25,114.95) 83.39,114.81 DD4.6
  Bottom Layer w0.25: v1(83.25,114.95) 83.25,114.825 83.05,114.625 83.05,113.225 83.475,112.8 86.175,112.8 94.725,104.25 v1(94.725,102.375)
SS: DD3.63 DD4.1 | length 37.8
  Top Layer w0.25: DD3.63 89.375,95.25 89.975,94.65 91.1,94.65 94,97.55 94,100.6 94.225,100.825 v1(94.225,101.2)
  Top Layer w0.5: DD4.1 80.325,117.35 82.2,115.475 v1(82.2,114.025)
  Bottom Layer w0.25: v1(82.2,114.025) 82.2,113.325 85.569,109.956 87.144,109.956 89.05,108.05 89.05,105.6 91.675,102.975 92.625,102.975 94.225,101.375 v1(94.225,101.2)
TST: C4.1 DD3.53 J1.1 R1.1 | length 63.5
  Top Layer w0.25: J1.1 55.825,79.475 57.175,80.825 57.175,87.375 57.651,87.851 C4.1 R1.1@61.35,87.851 ; DD3.53 87.9,90.25 89.15,89 89.15,86.125 v1(88.425,85.4)
  Bottom Layer w0.25: v1(59.925,87.825) 59.925,84.15 60.35,83.725 61.375,83.725 62.35,82.75 62.35,81.75 63,81.1 64.659,81.1 68.459,77.3 74.264,77.3 75.375,78.411 75.375,81.134 78.866,84.625 81.925,84.625 81.945,84.604 87.629,84.604 v1(88.425,85.4)
TXD: DD3.98 R4.1 | length 23.4
  Top Layer w0.25: v1(70,102.875) 70,103.15 71.475,104.625 73.125,104.625 73.425,104.325 DD3.98
  Top Layer w0.3: R4.1@58.9,92.4 R4.1 58.825,92.95 59.525,93.65 v1(60.05,93.65)
  Bottom Layer w0.25: 66.125,100.025 66.15,100.025 68.175,102.05 69.175,102.05 v1(70,102.875)
  Bottom Layer w0.3: v1(60.05,93.65) 60.05,95.175 62.825,97.95 65.175,97.95 66.125,98.9 66.125,100.025
TXD_485: DD3.75 U1.4 | length 32.4
  Top Layer w0.25: DD3.75 87.225,101.25 87.425,101.45 87.425,102.1 v1(86.95,102.575)
  Top Layer w0.5: v1(64.6,100.1) 64.61,100.09 U1.4
  Bottom Layer w0.25: v1(64.6,100.1) 71.375,106.875 82.225,106.875 85.075,104.025 85.825,104.025 86.95,102.9 v1(86.95,102.575)
VIN: FU7.1 XP1.4 XP3.3 | length 49.3
  Top Layer w1: XP3.3 103.9,109.75 104.8,110.65 FU7.1
  Bottom Layer w1: XP1.4 71.025,109.75 72.05,110.775 72.05,113.35 73.975,115.275 78.525,115.275 81.3,118.05 85.5,118.05 95.875,107.675 100.35,107.675 XP3.3
VIN_F: C20.1 C22.2 DA1.6 R8.1 R9.1 VT2.3 | length 18.9
  Top Layer w0.5: DA1.6 90.29,81.61 90.624,81.276 C20.1 95.126,81.276 C22.2 ; R8.1 R9.1 93.55,85 94,84.55 94,81.35
  Top Layer w1: 103.875,84.625 103.925,84.575
  other v1: 103.125,77.1 105.5,77.1 104.35,78.225 105.5,79.225 103.65,79.35 104.35,80.45 105.5,81.475 103.05,85.95 103.05,87.525 103.075,88.875
pads on no net: 1.1 2.1 DD3.1 DD3.2 DD3.3 DD3.4 DD3.5 DD3.6 DD3.7 DD3.8 DD3.9 DD3.13 DD3.14 DD3.16 DD3.18 DD3.19 DD3.20 DD3.21 DD3.24 DD3.25 DD3.26 DD3.27 DD3.29 DD3.30 DD3.32 DD3.33 DD3.34 DD3.35 DD3.36 DD3.37 DD3.38 DD3.39 DD3.40 DD3.43 DD3.44 DD3.48 DD3.49 DD3.50 DD3.51 DD3.52 DD3.56 DD3.57 DD3.58 DD3.59 DD3.64 DD3.69 DD3.70 DD3.77 DD3.78 DD3.79 DD3.80 DD3.81 DD3.82 DD3.85 DD3.86 DD3.87 DD3.88 DD3.89 DD3.90 DD3.91 DD3.92 DD3.93 DD3.94 DD3.95 DD3.100 XP1.7 XP2.1 XP2.4 XP2.6 XP3.5

## Polygon pours and split planes (outlines as drawn)
GND on Top Layer "TOP" (hatched 90Degree grid 0.15 track 0.2, remove dead copper, pour order 2): 50.8,119.2 111.8,119.2 111.8,76.2 50.8,76.2
GND on Bottom Layer "BOT" (hatched 90Degree grid 0.15 track 0.2, remove dead copper, pour order 4): 50.8,119.2 111.8,119.2 111.8,76.2 50.8,76.2

## Keep-outs
Keep-Out Layer:
  the board outline again, w0.2

## Other copper
Top Layer:
  rectangle net VIN_F: 96.8,83.125 103.55,86.025
  rectangle net VIN_F: 102.325,76.5 106.125,81.875
  rectangle net VIN_F: 102.325,81.875 111.5,89.625
  pour cut-out: 69.637,85.587 69.912,85.664 72.437,85.763 73.09,85.346 73.062,76.863 71.387,76.563 69.712,76.863 69.662,76.913
  pour cut-out: 50.8,119.2 56.2,119.2 56.2,113.425 54.825,112.05 50.85,112.05 50.8,112.1
Bottom Layer:
  rectangle net VIN_F: 102.325,76.5 106.125,81.875
  rectangle net VIN_F: 102.325,81.875 111.5,89.625
  pour cut-out: 69.687,85.487 69.962,85.564 72.487,85.663 73.14,85.246 73.112,76.763 71.437,76.463 69.762,76.763 69.712,76.813
  pour cut-out: 50.8,119.2 56.2,119.2 56.2,113.425 54.825,112.05 50.85,112.05 50.8,112.1

## Silkscreen, mask and mechanical layers (free items; w line width, h text height)
Top Overlay:
  circle w0.1: c52.346,92.525 r0.2
  circle w0.254: c53.625,114.8 r2.7
  circle w0.254: c108.968,79.017 r2.7
  lines w0.2: 59.925,94.75 59.925,95 60.275,95.35 ; 69.475,102.65 70.475,102.65 70.925,103.1 70.925,103.3 ; 72.9,115.475 72.9,116.125 73.125,116.35 ; 85.225,87.275 85.925,86.575 86.675,86.575 ; 90.85,113.8 90.85,114.075 91.45,114.675 92.35,115.575 ; 106.7,100.375 106.7,100.75 107.075,101.125 ; 110.475,98.175 110.825,97.825 110.825,97.075
  text "RESET" at 95.825,94.525 h0.8 r90
  text "TST" at 55.725,79.5 h0.8 r90
Mechanical 1:
  rectangle: 125.9,101.2 127,103.2
  rectangle: 123.95,105.825 125.075,107.025
  rectangle: 126.225,100.9 126.8,101.2
  lines w0.1: 125,105.825 123.95,105.825 cw(c123.95,106.425) 123.95,107.025 125.075,107.025 125.075,105.9
  lines w0.2: 124.175,106.425 126.475,106.425 126.475,105.6 126.475,100.725 126,101.2 ; 125.9,101.2 125.9,103.2 ; 126.525,100.725 127,101.2 127,103.225 ; 124.45,101.2 124.45,103.125 124.55,103.225 140,103.225 140,101.2 124.45,101.2
  text "Монтаж светодиодов VD7,VD8" at 114.975,116.275 h0.8
Mechanical 3:
  lines w0.1: 132.9,108.9 132.937,108.937 132.975,108.975 ; 132.975,110.1 132.975,110.1
  lines w0.2: 133.8,104.275 133.9,104.275 ; 134.375,103.8 134.425,103.8

## Dimensions
124.55,103.225 to 126.475,106.425 on Mechanical 1
124.45,101.2 to 123.35,106.425 on Mechanical 1
50.8,76.2 to 50.8,119.2 on Mechanical 1
50.8,76.2 to 111.8,76.2 on Mechanical 1